# EAGLE board opbouw_thuis (EAGLE 6.3)
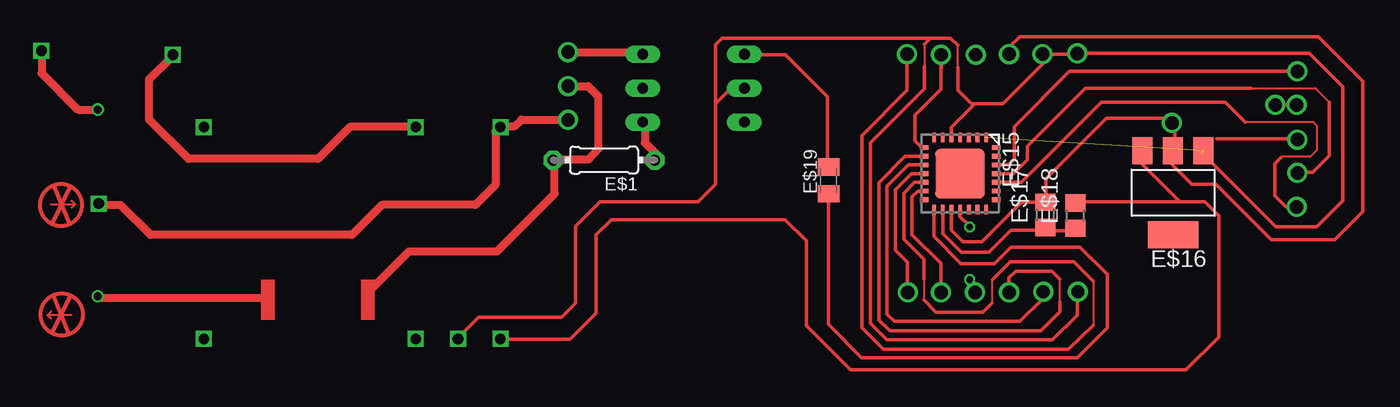
[diagram p0: board, top side]
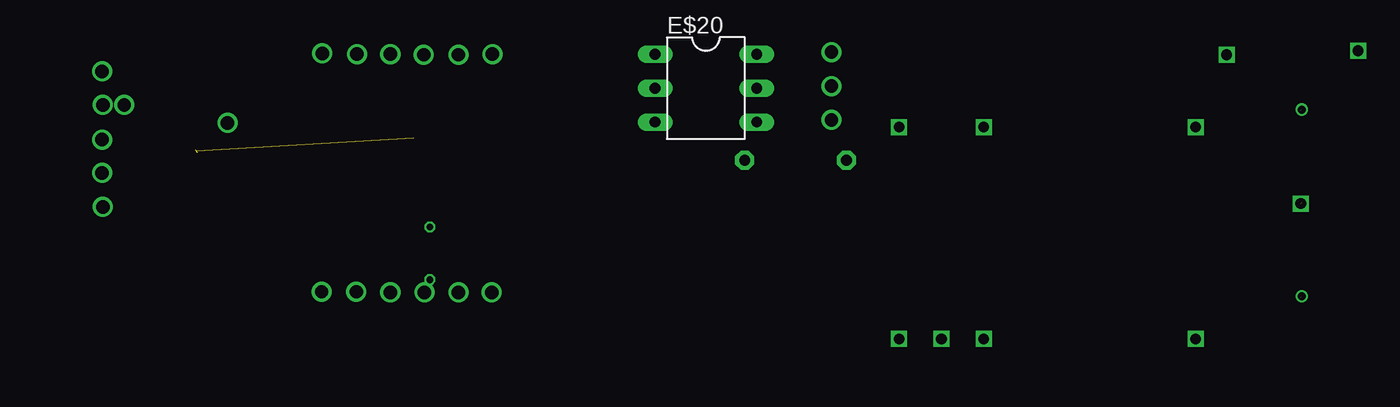
[diagram p1: board, bottom side, seen from below]

No outline drawn. Coordinates in mm, seen from the top.
Copper layers (1*16): Top 0.035mm / dielectric 1.5mm / Bottom 0.035mm
Design rules "ITEADstudio_DRC": minimum track width 6mil, minimum drill 12mil, track to track 6mil, track to pad 6mil, pad to pad 6mil, via to via 6mil, smd to smd 0mil, copper to edge 10mil, drill to drill 10mil, minimum pad ring 10mil, minimum via ring 6mil, stop-mask expansion 2mil, vias tented up to drill 100mil, thermal gap 10mil

## Footprints (pad centres in the part's own frame; a part is rotated, then mirrored left to right if it is on the bottom)
0204/7 = drill 0.813 pad 1.422 octagon: 1 -3.81,0; 2 3.81,0
QFN28-ML_6X6MM = smd 0.7 x 0.35: 1 -2.7,1.95; 2 -2.7,1.3; 3 -2.7,0.65; 4 -2.7,0; 5 -2.7,-0.65; 6 -2.7,-1.3; 7 -2.7,-1.95; 15 2.7,-1.95; 16 2.7,-1.3; 17 2.7,-0.65; 18 2.7,0; 19 2.7,0.65; 20 2.7,1.3; 21 2.7,1.95 | smd 0.35 x 0.7: 8 -1.95,-2.7; 9 -1.3,-2.7; 10 -0.65,-2.7; 11 0,-2.7; 12 0.65,-2.7; 13 1.3,-2.7; 14 1.95,-2.7; 22 1.95,2.7; 23 1.3,2.7; 24 0.65,2.7; 25 0,2.7; 26 -0.65,2.7; 27 -1.3,2.7; 28 -1.95,2.7 | smd 3.7 x 3.7: EXP 0,0
SOT223 = smd 1.499 x 2.007: 1 -2.261,-3.15; 2 0.025,-3.15; 3 2.311,-3.15 | smd 3.81 x 2.007: 4 0,3.15
L0805 = smd 1.3 x 1.5: 1 -0.95,0; 2 0.95,0
C0805K = smd 1.3 x 1.6: 1 -1,0; 2 1,0
DIL06 = drill 0.813 long: 1 -2.54,-3.81; 2 0,-3.81; 3 2.54,-3.81; 4 2.54,3.81; 5 0,3.81; 6 -2.54,3.81

## Placement (x,y rotation side)
E$1  [0204/7]  49.19,18.46 180 top
E$2  [4012]  23.5,6.5 0 top
E$15  [QFN28-ML_6X6MM]  75.88,17.45 270 top
E$16  [SOT223]  91.84,16.01 180 top
E$17  [L0805]  82.25,14.35 90 top
E$18  [L0805]  84.5,14.3 90 top
E$19  [C0805K]  66.03,16.94 90 top
E$20  [DIL06]  55.9,23.85 270 bottom

## Library data of the parts
E$1 = qfm-trx1-24g
E$2 = 4012
E$15 = microchip-6
E$16 = burr-brown 2
E$17 E$18 = rcl 2
E$19 = rcl-2
E$20 = ref-packages 2

## Nets
S$18: E$15.1 E$16.1
S$137: E$15.13
S$138: E$15.11
S$140: E$15.12
S$142: E$15.18
S$143: E$15.9
S$144: E$15.8
S$145: E$15.10
S$147: E$15.25
S$148: E$15.24
S$168: E$15.5

## Tracks (layer width: path | path; a pad name or v marks a point on that pad's centre or on a via)
S$1
  Top 0.16: 97.25,21.3 102.35,21.3 102.6,21.05 102.6,19.2 102.1,18.7 99.95,18.7 99.9,18.65
  Top 0.254: 79.8,16.8 80.45,16.8 86.45,22.8 95.75,22.8 97.25,21.3 | 99.9,18.65 99.45,18.2 99.45,15.8 100.3,14.95 101,14.95 101.05,15
S$2  (1 unrouted)
  Top 0.254: 84.55,26.45 102.05,26.45 104.55,23.95 104.55,15.4 102.6,13.45 99.55,13.45 94,19
S$3
  Top 0.254: 59.7,26.35 62.8,26.35 65.95,23.2 65.95,18.15 65.9,18.1
S$4
  Top 0.61: 41.25,21 42.5,21 43,21.5 46.5,21.5
S$6
  Top 0.61: 46.5,24 48,24 48.75,23.25 48.75,19.3 48,18.5 45.55,18.5
S$7  (via drill 0.6)  (1 unrouted)
  other vias: 11.25,8.25 11.25,22.25
S$9
  Top 0.61: 52.25,21.5 52.25,19.75 53,19
S$10
  Top 0.61: 11.2,8.15 23.95,8.15 24,8.2
S$12
  Top 0.305: 7.9,8.3 9.05,5.5
S$13
  Top 0.305: 9.2,8.3 7.85,5.55
S$14
  Top 0.16: 9.3,6.85 7.5,6.85 | 7.75,7.1 7.5,6.85 | 7.5,6.85 7.75,6.6
S$15
  Top 0.305: 7.85,13.7 9.2,16.45
S$16
  Top 0.305: 9.15,13.7 8,16.5
S$17
  Top 0.16: 7.75,15.15 9.55,15.15 | 9.3,14.9 9.55,15.15 | 9.55,15.15 9.3,15.4
S$18  (2 unrouted)
S$67
  Top 0.254: 78.5,18.1 79.5,18.1 79.95,18.55 79.95,20.95 84.05,25.1 85.55,25.1 101.1,25.1
S$70
  Top 0.254: 38.41,5.24 38.23,5.06
S$71  (via drill 0.8)
  other vias: 41.43,5.06 41.43,20.93
S$73  (via drill 0.8)
  other vias: 38.26,5.06
S$74  (via drill 0.8)
  other vias: 35.08,5.06 19.2,5.06
S$76  (via drill 0.8)
  other vias: 35.08,20.93 19.2,20.93
S$77
  Top 0.61: 41.41,20.96 41.43,20.98
S$79
  Top 0.254: 59.35,23.85 58.7,23.85 57.55,22.7 57.55,16.65 56.25,15.35 48.9,15.35 47.05,13.5 47.05,7.75 46,6.7 39.8,6.7 38.2,5.1
S$81
  Top 0.61: 52.05,26.5 46.5,26.5 46.45,26.55
S$83
  Top 0.61: 31.3,8.35 34.55,11.6 41.15,11.6 45.5,15.95 45.5,18.3 45.35,18.45
S$85
  Top 0.61: 41.05,20.6 41.05,16.6 39.55,15.1 32.55,15.1 30.3,12.85 15.2,12.85 12.95,15.1 11.3,15.1
S$86
  Top 0.61: 35.2,20.95 30.15,20.95 27.75,18.55 18.05,18.55 15.1,21.5 15.1,24.5 16.85,26.25
S$87  (via drill 1)
  other vias: 46.5,21.47
S$88  (via drill 1)
  other vias: 46.5,24.01
S$89  (via drill 1)
  other vias: 46.5,26.55
S$92
  Top 0.16: 97.7,23.85 102.5,23.85 103.55,22.8
  Top 0.254: 97.7,23.85 85.25,23.85 80.9,19.5 80.9,18.5 79.85,17.45 78.8,17.45 | 103.55,22.8 103.55,18.8 102.3,17.55 101.1,17.55
S$93
  Top 0.254: 91.95,19.35 91.95,21.05 91.4,21.6 86.85,21.6 82.3,17.05 82.3,15.55
S$95
  Top 0.254: 89.5,18.9 89.5,18.2 92.35,15.35 | 88.6,15.35 92.35,15.35 | 92.35,15.35 94.2,15.35 95.25,14.3 95.25,5.2 92.8,2.75 67.65,2.75 64.35,6.05 64.35,12.4 62.75,14 49.75,14 48.6,12.85 48.6,7 46.65,5.05 41.75,5.05 41.65,5.15
S$97
  Top 0.254: 101.15,20.05 95.1,20.05
S$98  (via drill 0.8)  (2 unrouted)
  other vias: 16.88,26.35 7.03,26.65
S$99
  Top 0.61: 7.05,26.6 7.05,24.95 9.75,22.25 11.45,22.25
S$102  (via drill 0.8)  (1 unrouted)
  other vias: 11.32,15.2
S$137
  Top 0.254: E$15.13 72.72,16.14 72.28,15.7 72.28,12.88 74.42,10.72 74.42,9.64 74.41,8.45
S$138
  Top 0.254: 71.92,8.55 71.92,10.83 71.03,11.72 71.03,16.25 72.22,17.45 E$15.11
S$140
  Top 0.15: 78.28,9.5 78.28,7.75 | 73.15,9.55 73.15,8 | 73.15,11.03 73.15,11
  Top 0.254: 78.28,7.75 77.6,7.08 74.08,7.08 73.15,8 | 73.15,11 73.15,9.55 | 73.15,11.03 71.65,12.53 71.65,15.97 72.47,16.8 E$15.12
S$141  (via drill 1)
  Top 0.254: 71.9,26.17 v71.9,26.4 71.9,23.68 68.53,20.3 68.53,5.9 70.12,4.3 84,4.3 85.85,6.1
S$142
  Top 0.254: E$15.18 75.88,14.22 76.45,13.65
S$143
  Top 0.15: 83.35,7.85 83.35,9.55
  Top 0.254: E$15.9 71.75,18.75 69.78,16.75 69.78,6.47 70.62,5.67 81.92,5.67 83.35,7.1 83.35,7.85 | 79.54,9.05 79.54,9.64 80.05,10.15 82.75,10.15 83.35,9.55
S$144
  Top 0.254: E$15.8 73,19.39 72.5,19.9 72.5,21.82 74.45,23.77 74.45,26.39 74.46,25.35
S$145
  Top 0.254: E$15.10 72,18.09 70.4,16.5 70.4,6.92 70.95,6.38 80.36,6.38 82.1,8.12 82.05,8.72
  Top 0.305: 82.05,8.72 82.03,8.6
S$147
  Top 0.254: E$15.25 79.69,17.45
S$148
  Top 0.254: E$15.24 80,16.8
S$149
  Top 0.254: 73.25,15.5 73.05,15.5
S$150  (via drill 0.5)
  other vias: 76.6,13.45 76.6,9.5
S$151
  Top 0.254: 84.6,26.4 84.35,26.55
S$152  (via drill 1)
  other vias: 84.65,26.45
S$153  (via drill 1)
  other vias: 77.05,26.35
S$154  (via drill 1)
  other vias: 74.45,26.35
S$155  (via drill 1)
  other vias: 71.95,8.55
S$156  (via drill 1)
  other vias: 74.45,8.55
S$157  (via drill 1)
  other vias: 77,8.55
S$158  (via drill 1)
  other vias: 79.55,8.55
S$159  (via drill 1)
  other vias: 82.1,8.6
S$160  (via drill 1)
  other vias: 84.7,8.6
S$161
  Top 0.16: 85.85,9.4 85.85,6.07
  Top 0.254: 78.3,9.5 79.65,10.85 84.4,10.85 85.85,9.4
S$163  (via drill 1)
  Top 0.254: 79.5,26.45 v79.55,26.4 79.55,26.9 80.35,27.7 102.7,27.7 106.05,24.35 106.05,14.6 103.95,12.5 99.2,12.5 95.05,16.65 93.25,16.65 91.75,18.15
S$165
  Top 0.254: 84.55,15.25 84.8,15.35 89.05,15.35
S$167
  Top 0.254: 75.23,14.65 75.23,13.2 76.08,12.35 77.5,12.35 80.45,15.3 81.9,15.3
S$168  (via drill 1)
  Top 0.15: 75.7,25.4 75.7,27.05 | 73.2,27.15 73.2,25.5
  Top 0.254: 82.08,26.4 82.08,25.68 79.1,22.7 77,22.7 | 77,22.7 75.23,20.91 75.23,20.17 E$15.5 | 82.08,26.4 82.05,26.38 v82.05,26.4 82.08,26.4 | 77,22.7 76.69,22.71 75.7,23.7 75.7,25.4 | 84.62,9.05 84.65,9.03 84.65,6.85 82.8,5 70.4,5 69.15,6.25 69.15,19.75 73.2,23.8 73.2,25.5 | 84.55,26.4 82.08,26.4 | 73.2,27.15 73.65,27.6 | 73.65,27.6 75.15,27.6 75.7,27.05 | 73.65,27.6 58.05,27.6 57.55,27.1 57.55,22.7
S$169
  Top 0.254: 82.2,15.35 82.15,15.3
S$170
  Top 0.254: 81.65,13.15 84.45,13.15 84.55,13.25
S$171
  Top 0.254: 74.58,14.65 74.58,12.95 75.98,11.55 78.05,11.55 79.7,13.2 81.85,13.2
S$172
  Top 0.254: 73.93,14.6 73.93,12.75 75.95,10.7 78.45,10.7 79.7,11.95 84.85,11.95 86.9,9.9 86.9,5.9 84.65,3.65 68.5,3.65 66,6.15 66,15.4
S$177
  Top 0.254: 101.23,15.05 101.15,14.97
S$179
  Top 0.254: 101.15,22.59 99.51,22.61 101.6,22.6 | 101.6,22.6 101.21,22.59 101.21,22.58 | 101.19,22.27 101.6,22.6
S$181  (via drill 1)
  other vias: 101.1,14.95
S$182  (via drill 1)
  other vias: 101.15,17.5
S$183  (via drill 1)
  other vias: 101.15,20
S$184  (via drill 1)
  other vias: 101.1,22.6 99.5,22.6 91.75,21.25
S$185  (via drill 1)
  other vias: 101.15,25.1
(copper drawn outside any net)
  shapes: Top circle x2